# EAGLE board 8x8 LED Matrix (EAGLE 7.6.0)

Size 73.58 x 876.19 mm. Coordinates in mm from the lower left corner, seen from the top.
Outline: 0,0 56.82,0 56.82,53.33 0,53.33 0,0
Copper layers (1*16): Top 0.035mm / dielectric 1.5mm / Bottom 0.035mm
Design rules "default": minimum track width 10mil, minimum drill 24mil, track to track 8mil, track to pad 8mil, pad to pad 8mil, via to via 8mil, smd to smd 8mil, copper to edge 40mil, drill to drill 8mil, minimum pad ring 10mil, minimum via ring 8mil, stop-mask expansion 4mil, vias tented up to drill 0mil, thermal gap 10mil

## Footprints (pad centres in the part's own frame; a part is rotated, then mirrored left to right if it is on the bottom)
LED5MM = drill 0.813 octagon: A -1.27,0; K 1.27,0
0207/10 = drill 0.813 octagon: 1 -5.08,0; 2 5.08,0
TO92 = drill 0.813 octagon: 1 1.27,0; 2 0,1.905; 3 -1.27,0
ARDUINO_UNO = drill 1.016 pad 1.88: 0 63.5,50.8; 1 60.96,50.8; 2 58.42,50.8; 3 55.88,50.8; 3.3V 35.56,2.54; 4 53.34,50.8; 5 50.8,50.8; 5V 38.1,2.54; 6 48.26,50.8; 7 45.72,50.8; 8 41.656,50.8; 9 39.116,50.8; 10 36.576,50.8; 11 34.036,50.8; 12 31.496,50.8; 13 28.956,50.8; A0 50.8,2.54; A1 53.34,2.54; A2 55.88,2.54; A3 58.42,2.54; A4 60.96,2.54; A5 63.5,2.54; AREF 23.876,50.8; GND 26.416,50.8; GND. 43.18,2.54; GND.. 40.64,2.54; I/OREF 30.48,2.54; N/C 27.94,2.54; RESET 33.02,2.54; SCL 18.796,50.8; SDA 21.336,50.8; VIN 45.72,2.54 | hole 3.2: 66.04,7.62; 66.04,35.56; 15.24,50.8; 13.97,2.54
DIL16 = drill 0.813 long: 1 -8.89,-3.81; 2 -6.35,-3.81; 3 -3.81,-3.81; 4 -1.27,-3.81; 5 1.27,-3.81; 6 3.81,-3.81; 7 6.35,-3.81; 8 8.89,-3.81; 9 8.89,3.81; 10 6.35,3.81; 11 3.81,3.81; 12 1.27,3.81; 13 -1.27,3.81; 14 -3.81,3.81; 15 -6.35,3.81; 16 -8.89,3.81

## Placement (x,y rotation side)
D3  [LED5MM]  5,10.08 0 top
D4  [LED5MM]  5,22.78 0 top
D5  [LED5MM]  5,35.48 0 top
D6  [LED5MM]  5,48.18 0 top
D7  [LED5MM]  5,60.88 0 top
D8  [LED5MM]  5,73.58 0 top
D9  [LED5MM]  5,86.28 0 top
D10  [LED5MM]  5,98.98 0 top
D11  [LED5MM]  5,111.68 0 top
D12  [LED5MM]  5,124.38 0 top
D13  [LED5MM]  5,137.08 0 top
D14  [LED5MM]  5,149.78 0 top
D16  [LED5MM]  5,162.48 0 top
D18  [LED5MM]  5,175.18 0 top
D19  [LED5MM]  5,187.88 0 top
D20  [LED5MM]  5,200.58 0 top
D21  [LED5MM]  5,213.28 0 top
D22  [LED5MM]  5,225.98 0 top
D23  [LED5MM]  5,238.68 0 top
D24  [LED5MM]  5,251.38 0 top
D25  [LED5MM]  5,264.08 0 top
D26  [LED5MM]  5,276.78 0 top
D27  [LED5MM]  5,289.48 0 top
D28  [LED5MM]  5,302.18 0 top
D29  [LED5MM]  5,314.88 0 top
D30  [LED5MM]  5,327.58 0 top
D31  [LED5MM]  5,340.28 0 top
D32  [LED5MM]  5,352.98 0 top
D33  [LED5MM]  5,365.68 0 top
D34  [LED5MM]  5,378.38 0 top
D35  [LED5MM]  5,391.08 0 top
D36  [LED5MM]  5,403.78 0 top
D37  [LED5MM]  5,416.48 0 top
D38  [LED5MM]  5,429.18 0 top
D39  [LED5MM]  5,441.88 0 top
D40  [LED5MM]  5,454.58 0 top
D41  [LED5MM]  5,467.28 0 top
D42  [LED5MM]  5,479.98 0 top
D43  [LED5MM]  5,492.68 0 top
D44  [LED5MM]  5,505.38 0 top
D45  [LED5MM]  5,518.08 0 top
D46  [LED5MM]  5,530.78 0 top
D47  [LED5MM]  5,543.48 0 top
D48  [LED5MM]  5,556.18 0 top
D49  [LED5MM]  5,568.88 0 top
D50  [LED5MM]  5,581.58 0 top
D51  [LED5MM]  5,594.28 0 top
D52  [LED5MM]  5,606.98 0 top
D53  [LED5MM]  5,619.68 0 top
D54  [LED5MM]  5,632.38 0 top
D55  [LED5MM]  5,645.08 0 top
D56  [LED5MM]  5,657.78 0 top
D57  [LED5MM]  5,670.48 0 top
D58  [LED5MM]  5,683.18 0 top
D59  [LED5MM]  5,695.88 0 top
D60  [LED5MM]  5,708.58 0 top
D61  [LED5MM]  5,721.28 0 top
D62  [LED5MM]  5,733.98 0 top
D63  [LED5MM]  5,746.68 0 top
D64  [LED5MM]  5,759.38 0 top
D65  [LED5MM]  5,772.08 0 top
D66  [LED5MM]  5,784.78 0 top
D67  [LED5MM]  5,797.48 0 top
D68  [LED5MM]  5,810.18 0 top
R2  0.5k‎Ω  [0207/10]  5,860.98 0 top
R3  1k‎Ω  [0207/10]  5,848.28 0 top
R4  0.5k‎Ω  [0207/10]  5,873.68 0 top
R7  0.5k‎Ω  [0207/10]  5,886.38 0 top  (outside the outline)
R9  0.5k‎Ω  [0207/10]  5,899.08 0 top  (outside the outline)
R10  0.5k‎Ω  [0207/10]  5,911.78 0 top  (outside the outline)
R11  0.5k‎Ω  [0207/10]  5,924.48 0 top  (outside the outline)
R12  0.5k‎Ω  [0207/10]  5,937.18 0 top  (outside the outline)
R13  1k‎Ω  [0207/10]  5,1064.18 0 top  (outside the outline)
R14  1k‎Ω  [0207/10]  5,1076.88 0 top  (outside the outline)
R15  1k‎Ω  [0207/10]  5,1089.58 0 top  (outside the outline)
R16  1k‎Ω  [0207/10]  5,1102.28 0 top  (outside the outline)
R18  1k‎Ω  [0207/10]  5,1114.98 0 top  (outside the outline)
R19  1k‎Ω  [0207/10]  5,1127.68 0 top  (outside the outline)
R20  1k‎Ω  [0207/10]  5,1140.38 0 top  (outside the outline)
R21  1k‎Ω  [0207/10]  5,1153.08 0 top  (outside the outline)
T1  [TO92]  5,975.28 0 top  (outside the outline)
T2  [TO92]  5,987.98 0 top  (outside the outline)
T3  [TO92]  5,1000.68 0 top  (outside the outline)
T4  [TO92]  5,1013.38 0 top  (outside the outline)
T5  [TO92]  5,1026.08 0 top  (outside the outline)
T6  [TO92]  5,1038.78 0 top  (outside the outline)
T7  [TO92]  5,1051.48 0 top  (outside the outline)
T9  [TO92]  5,962.58 0 top  (outside the outline)
U1  [ARDUINO_UNO]  5,822.88 0 top
U2  [DIL16]  5,835.58 0 top
U3  [DIL16]  5,949.88 0 top  (outside the outline)

## Library data of the parts
D3-D14 D16 D18-D68 R2-R4 R7 R9-R16 R18-R21 T1-T7 T9 U1-U3 = AUTODESK_CIRCUITS_BREADBOARD

## Nets
N$1: D3.K D11.K D21.K D29.K D37.K D45.K D53.K D61.K T9.3
N$2: D21.A D22.A D23.A D24.A D25.A D26.A D27.A D28.A R10.1
N$3: D3.A D4.A D5.A D6.A D7.A D8.A D9.A D10.A R12.1
N$4: D29.A D30.A D31.A D32.A D33.A D34.A D35.A D36.A R9.1
N$5: D10.K D20.K D28.K D36.K D44.K D52.K D60.K D68.K T7.3
N$6: D9.K D19.K D27.K D35.K D43.K D51.K D59.K D67.K T6.3
N$7: D8.K D18.K D26.K D34.K D42.K D50.K D58.K D66.K T5.3
N$8: D7.K D16.K D25.K D33.K D41.K D49.K D57.K D65.K T4.3
N$9: D6.K D14.K D24.K D32.K D40.K D48.K D56.K D64.K T3.3
N$10: D5.K D13.K D23.K D31.K D39.K D47.K D55.K D63.K T2.3
N$11: D4.K D12.K D22.K D30.K D38.K D46.K D54.K D62.K T1.3
N$12: D37.A D38.A D39.A D40.A D41.A D42.A D43.A D44.A R7.1
N$13: D45.A D46.A D47.A D48.A D49.A D50.A D51.A D52.A R4.1
N$14: D53.A D54.A D55.A D56.A D57.A D58.A D59.A D60.A R2.1
N$15: R9.2 U2.4
N$16: R12.2 U2.7
N$17: R4.2 U2.2
N$18: U1.GND. U2.8 U2.13
N$19: U1.2 U2.12
N$20: R10.2 U2.5
N$21: U1.1 U2.14
N$22: R3.1 U2.15
N$23: R7.2 U2.3
N$24: U1.3 U2.11
N$25: R2.2 U2.1
N$26: D61.A D62.A D63.A D64.A D65.A D66.A D67.A D68.A R3.2
N$27: R14.2 U3.1
N$28: R18.2 U3.4
N$29: R20.1 U3.6
N$30: R21.1 U3.7
N$31: R15.2 U3.2
N$32: T1.1 T2.1 T3.1 T4.1 T5.1 T6.1 T7.1 T9.1 U1.GND U3.8 U3.13
N$33: U1.8 U3.10
N$34: U1.5 U3.12
N$35: R19.1 U3.5
N$36: U1.4 U3.14
N$37: R13.2 U3.15
N$38: R16.2 U3.3
N$39: U3.9
N$40: U1.6 U3.11
N$41: R13.1 T7.2
N$42: R14.1 T6.2
N$43: R15.1 T5.2
N$44: R16.1 T4.2
N$45: R18.1 T3.2
N$46: R19.2 T2.2
N$47: R20.2 T1.2
N$48: R21.2 T9.2
N$49: U2.9
N$50: U1.7 U2.10
N$51: U1.5V U2.16 U3.16
N$52: D11.A D12.A D13.A D14.A D16.A D18.A D19.A D20.A R11.1
N$53: R11.2 U2.6

## Tracks (layer width: path | path; a pad name or v marks a point on that pad's centre or on a via)
N$1  (8 unrouted)
N$2  (8 unrouted)
N$3  (8 unrouted)
N$4  (8 unrouted)
N$5  (8 unrouted)
N$6  (8 unrouted)
N$7  (8 unrouted)
N$8  (8 unrouted)
N$9  (8 unrouted)
N$10  (8 unrouted)
N$11  (8 unrouted)
N$12  (8 unrouted)
N$13  (8 unrouted)
N$14  (8 unrouted)
N$15  (1 unrouted)
N$16  (1 unrouted)
N$17  (1 unrouted)
N$18  (2 unrouted)
N$19  (1 unrouted)
N$20  (1 unrouted)
N$21  (1 unrouted)
N$22  (1 unrouted)
N$23  (1 unrouted)
N$24  (1 unrouted)
N$25  (1 unrouted)
N$26  (8 unrouted)
N$27  (1 unrouted)
N$28  (1 unrouted)
N$29  (1 unrouted)
N$30  (1 unrouted)
N$31  (1 unrouted)
N$32  (10 unrouted)
N$33  (1 unrouted)
N$34  (1 unrouted)
N$35  (1 unrouted)
N$36  (1 unrouted)
N$37  (1 unrouted)
N$38  (1 unrouted)
N$40  (1 unrouted)
N$41  (1 unrouted)
N$42  (1 unrouted)
N$43  (1 unrouted)
N$44  (1 unrouted)
N$45  (1 unrouted)
N$46  (1 unrouted)
N$47  (1 unrouted)
N$48  (1 unrouted)
N$50  (1 unrouted)
N$51  (2 unrouted)
N$52  (8 unrouted)
N$53  (1 unrouted)